# Altium PCB ART_CARD Rev 5.PcbDoc (part 6 of 13)
Units mil, origin at the board's own origin, x right, y up, seen from the top; angles counter-clockwise.
Board outline 6600.39 x 3903.54 mil, 8 copper layers (Top, Inner Layer 2, Inner Layer 3, Inner Layer 4, Inner Layer 5, Inner Layer 6, Inner Layer 7, Bottom), stack 63.111 mil thick; 542 components, 382 nets, 2410 pads, 1433 vias.
Unrouted connection lines stored in the file: 1247.
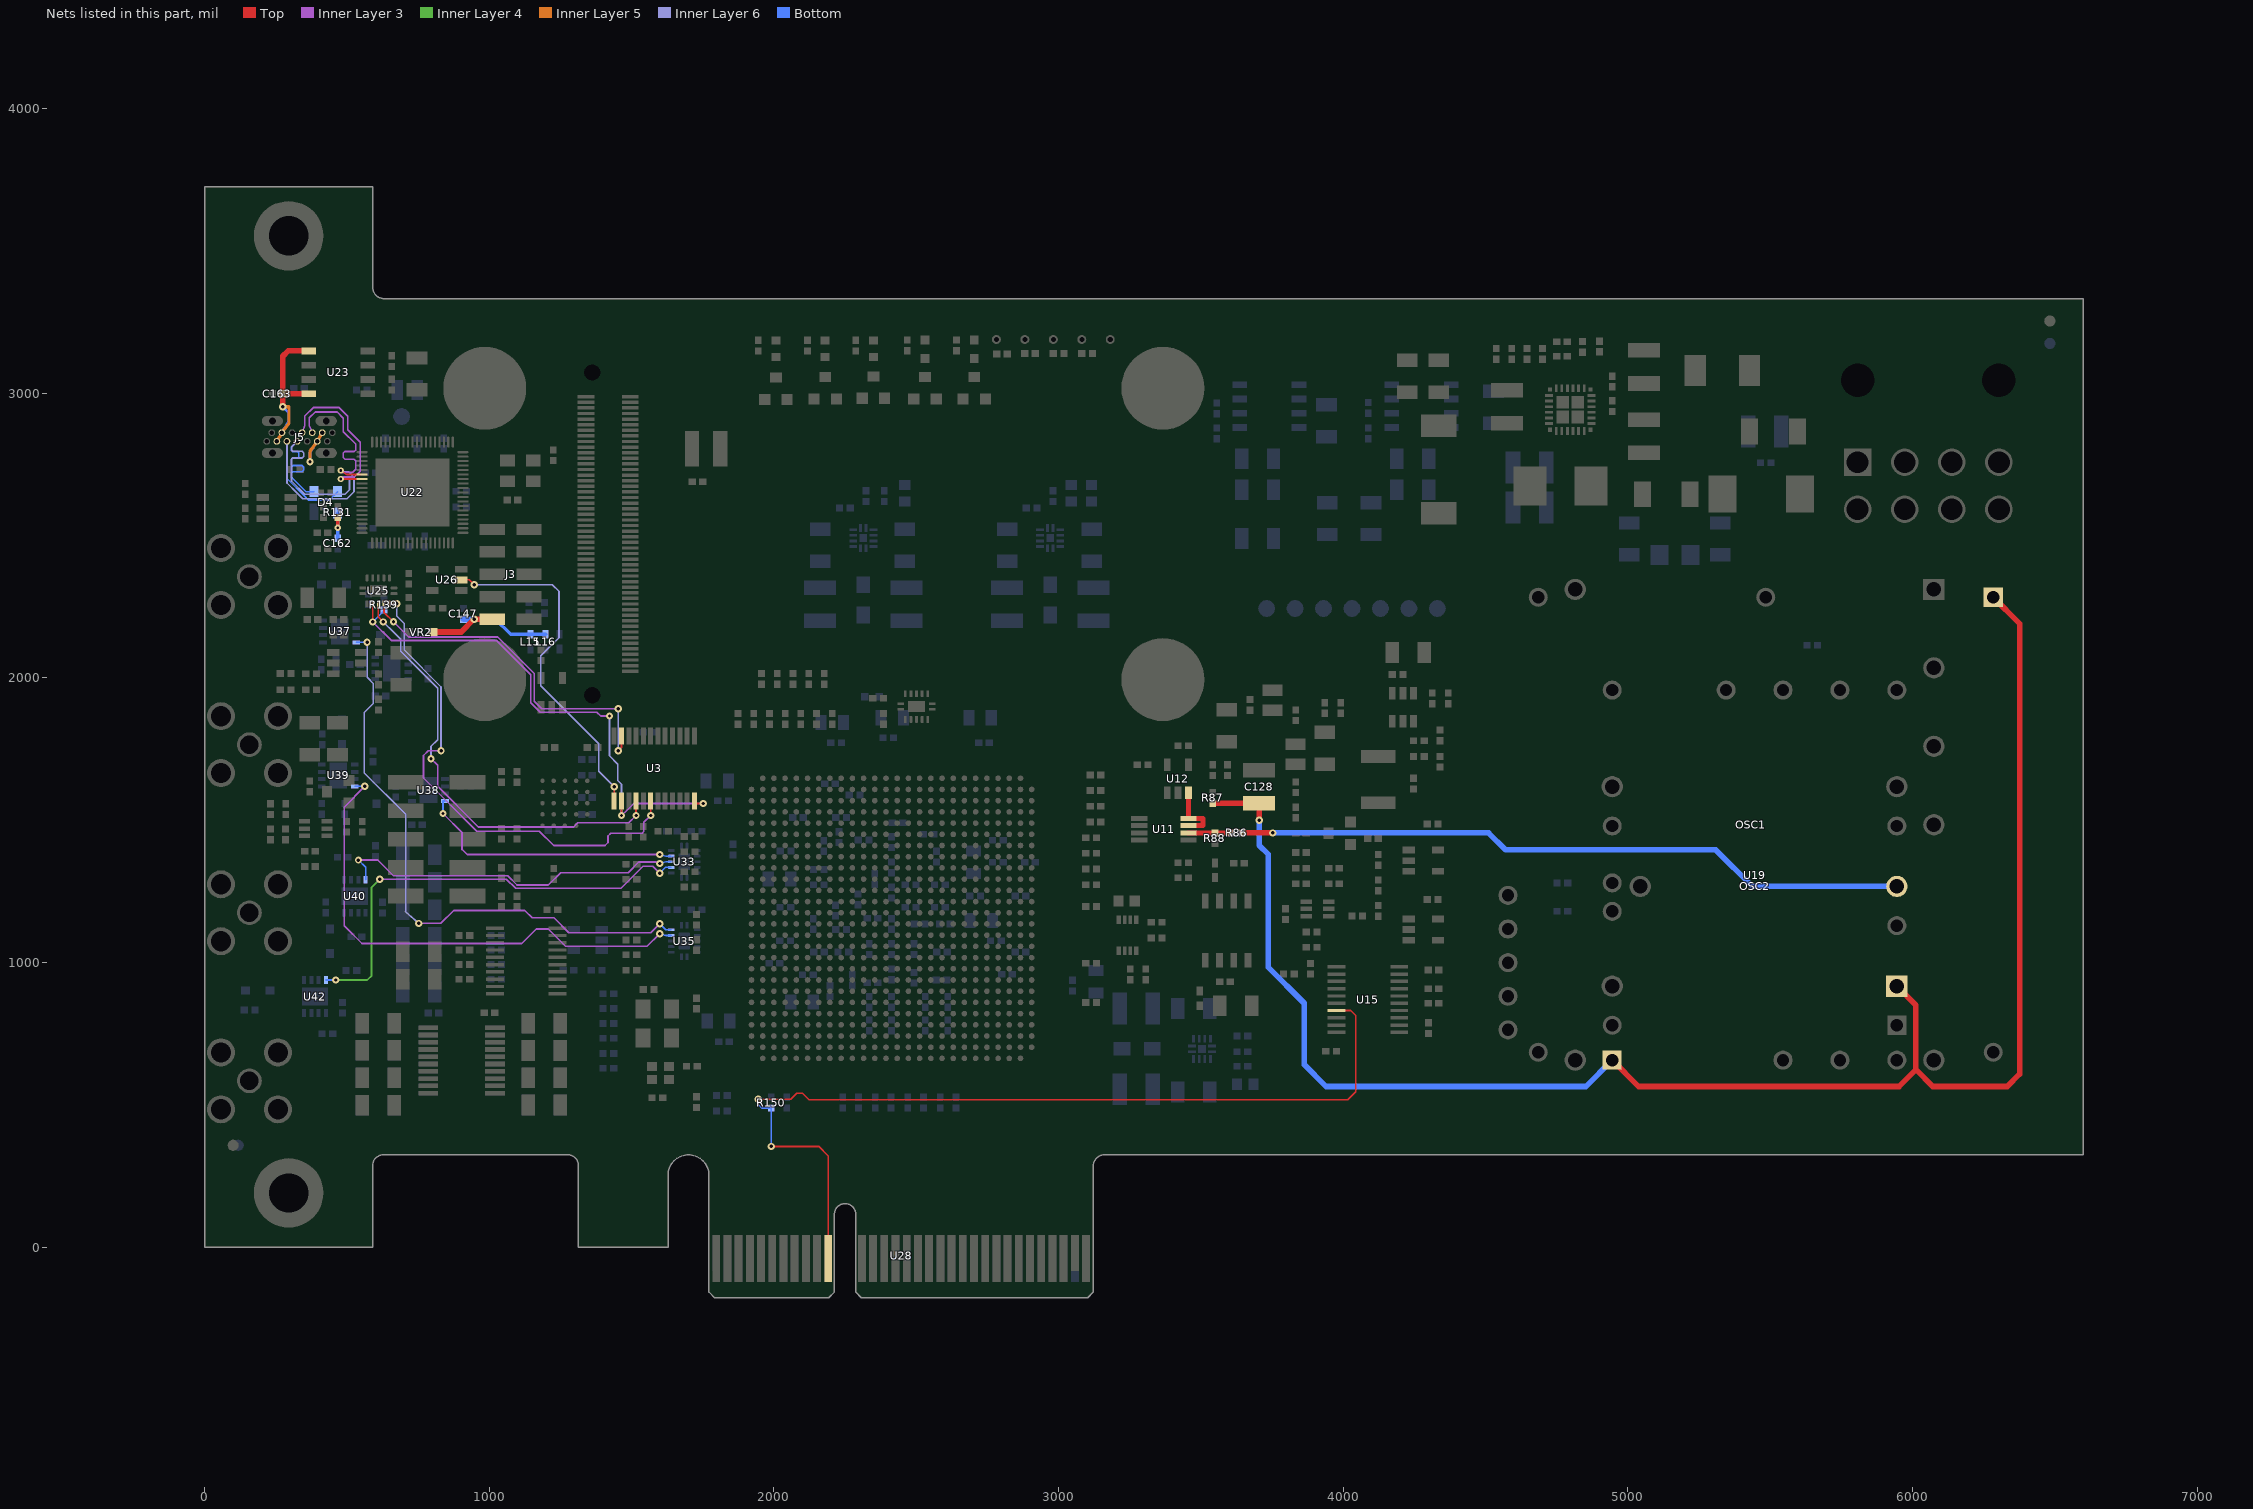
[diagram p12: the nets of this part, all layers, seen from the top]

## Via types
v1: diameter 25.59, hole 11.81, Top to Bottom, 915 vias
v2: diameter 21.65, hole 9.84, Top to Bottom, 518 vias

## Nets (pads, with @x,y where several pads share a name; then routed paths per layer and width w, separated by ;. In a path a pad name is that pad's centre, name@x,y a point inside that pad or via, vN(x,y) a via of type N, cw(c..) or ccw(c..) an arc to the next point about the centre after c; other vN are vias at no path point) (continued)
U_SEL_IO0F: U35.13 U37.8 | length 2089.8
  Inner Layer 3 w5.91: v1(751.97,1137.8) 829.72,1137.8 875,1183.07 1125,1183.07 1150.59,1157.48 1227.36,1157.48 1279.53,1105.31 1566.93,1105.31 v1(1598.43,1136.81)
  Inner Layer 6 w5.91: v1(570.87,2125) 570.87,2001.97 592.52,1980.31 592.52,1910.43 561.02,1878.94 561.02,1666.34 706.69,1520.67 706.69,1180.12 705.71,1179.13 v1(751.97,1137.8)
  Bottom w5.91: U37.8@532.48,2125 v1(570.87,2125) ; v1(1598.43,1136.81) 1620.08,1115.16 U35.13@1639.76,1115.16
U_SEL_IO1: U33.12 U38.8 | length 948.3
  Inner Layer 3 w5.91: v1(837.6,1523.62) 904.53,1456.69 904.53,1397.64 922.24,1379.92 v1(1598.43,1379.92)
  Bottom w5.91: v1(837.6,1523.62) 837.6,1567.91 U38.8@844.49,1567.91 ; v1(1598.43,1379.92) 1620.08,1374.02 U33.12@1639.76,1374.02
U_SEL_IO1F: U35.12 U39.8 | length 1796.1
  Inner Layer 3 w5.91: v1(562.99,1619.09) 490.16,1546.26 490.16,1129.92 553.15,1066.93 1114.17,1066.93 1165.35,1118.11 1206.69,1118.11 1267.72,1057.09 1554.13,1057.09 v1(1598.43,1101.38)
  Bottom w5.91: U39.8@527.56,1619.09 v1(562.99,1619.09) ; v1(1598.43,1101.38) 1620.08,1095.47 U35.12@1639.76,1095.47
U_SEL_IO2: U33.11 U40.8 | length 1251.5
  Inner Layer 3 w5.91: v1(540.35,1360.24) 608.27,1360.24 663.39,1305.12 1064.96,1305.12 1097.44,1272.64 1207.68,1272.64 1250.98,1315.94 1488.19,1315.94 1525.59,1353.35 1593.5,1353.35 v1(1598.43,1348.43)
  Bottom w5.91: v1(540.35,1360.24) 565.94,1334.65 U40.8@565.94,1291.34 ; v1(1598.43,1348.43) 1620.08,1354.33 U33.11@1639.76,1354.33
U_SEL_IO3: U33.10 U42.8 | length 1607
  Inner Layer 3 w5.91: v1(615.16,1293.31) 1060.04,1293.31 1092.52,1260.83 1462.6,1260.83 1540.35,1338.58 1573.82,1338.58 v1(1598.43,1313.98)
  Inner Layer 4 w5.91: v1(460.63,938.98) 571.85,938.98 586.61,953.74 586.61,1264.76 v1(615.16,1293.31)
  Bottom w5.91: U42.8@426.18,938.98 v1(460.63,938.98) ; v1(1598.43,1313.98) 1619.09,1334.65 U33.10@1639.76,1334.65
USB_DM: D4.3 J5.A7 J5.B7 U22.63 | length 1472.9
  Top w5.91: v2(478.35,2728.35) 500.98,2714.57 U22.63@553.15,2714.57
  Inner Layer 3 w5.91: J5.A7@377.95,2861.81 368.11,2887.25 368.11,2913.75 388.41,2934.06 465.92,2934.06 487.21,2912.77 487.21,2865.16 530.51,2821.85 530.51,2800.2 525.59,2795.28 492.13,2795.28 487.2,2790.35 487.2,2774.61 493.11,2768.7 524.61,2768.7 530.51,2762.8 530.51,2732.9 519.07,2721.46 485.24,2721.46 v2(478.35,2728.35)
  Inner Layer 6 w5.91: J5.B7@289.37,2831.1 289.37,2685.04 323.82,2650.59 344.49,2629.92 500,2629.92 524.61,2654.53 524.61,2704.72 505.91,2723.43 483.27,2723.43 v2(478.35,2728.35)
  Bottom w5.91: J5.B7@289.37,2831.1 289.37,2700.79 351.87,2638.29 365.16,2625 383.86,2625 437.99,2625 D4.3@467.52,2654.53
USB_DP: D4.2 J5.A6 J5.B6 U22.64 | length 1477.5
  Top w5.91: v2(478.35,2698.82) U22.64@553.15,2698.82
  Inner Layer 3 w5.91: J5.A6@342.52,2861.81 352.36,2887.25 352.36,2920.28 381.89,2949.8 472.44,2949.8 502.95,2919.29 502.95,2871.68 546.26,2828.37 546.26,2800.2 546.26,2732.9 546.26,2726.38 525.59,2705.71 485.24,2705.71 v2(478.35,2698.82)
  Inner Layer 6 w5.91: J5.B6@324.8,2831.1 306.1,2812.4 306.1,2800.2 310.04,2796.26 342.52,2796.26 348.43,2790.35 348.43,2778.54 342.52,2772.64 309.06,2772.64 305.12,2768.7 305.12,2691.93 351.38,2645.67 493.11,2645.67 508.86,2661.42 508.86,2697.83 501.97,2704.72 500,2704.72 484.25,2704.72 v2(478.35,2698.82)
  Bottom w5.91: J5.B6@324.8,2831.1 304.13,2810.43 304.13,2800.2 309.06,2795.28 326.77,2795.28 330.71,2791.34 330.71,2775.59 326.77,2771.65 309.06,2771.65 304.13,2766.73 304.13,2750 308.07,2746.06 342.52,2746.06 348.43,2740.16 348.43,2730.31 342.52,2724.41 309.06,2724.41 304.63,2719.98 304.63,2706.2 356.3,2654.53 D4.2@384.84,2654.53
USB_SPI_CLK: U3.18 U25.13 | length 1777.7
  Top w5.91: U25.13@649.61,2260.83 v1(675.2,2260.83) ; v1(1566.93,1516.73) U3.18@1566.93,1567.91
  Inner Layer 3 w5.91: v1(830.71,1744.09) 785.43,1744.09 768.7,1727.36 768.7,1648.62 955.71,1461.61 1176.18,1461.61 1226.38,1411.42 1406.5,1411.42 1417.32,1422.24 1417.32,1444.88 1427.17,1454.72 1536.91,1454.72 1542.82,1460.63 1542.82,1492.62 v1(1566.93,1516.73)
  Inner Layer 6 w5.91: v1(675.2,2260.83) 675.2,2217.52 701.28,2191.44 701.28,2097.93 830.71,1968.5 v1(830.71,1744.09)
USB_SPI_CSN: U3.16 U25.11 | length 1571.6
  Top w5.91: U25.11@610.24,2260.83 610.24,2214.57 v1(627.95,2196.85) ; v1(1515.75,1516.73) U3.16@1515.75,1567.91
  Inner Layer 3 w5.91: v1(795.28,1716.54) 818.9,1692.91 818.9,1619.09 961.61,1476.38 1296.26,1476.38 1311.02,1491.14 1490.16,1491.14 v1(1515.75,1516.73)
  Inner Layer 6 w5.91: v1(627.95,2196.85) 666.34,2158.46 688.98,2135.83 688.98,2093.5 818.9,1963.58 818.9,1783.46 795.28,1759.84 v1(795.28,1716.54)
USB_SPI_CTRL: R139.2 U3.14 U3.24 U25.10 | length 1911.5
  Top w5.91: v1(590.55,2196.85) U25.10@590.55,2260.83 ; v1(1464.57,1516.73) U3.14@1464.57,1567.91 ; U3.24@1720.47,1567.91 1720.47,1559.06 v1(1751.97,1559.06)
  Inner Layer 3 w5.91: v1(590.55,2196.85) 655.51,2131.89 1024.61,2131.89 1145.67,2010.83 1145.67,1913.39 1179.13,1879.92 1377.95,1879.92 1391.73,1866.14 v1(1422.24,1866.14) ; v1(1464.57,1516.73) 1483.27,1534.41 1507.91,1559.06 v1(1751.97,1559.06)
  Inner Layer 6 w5.91: v1(1422.24,1866.14) 1422.24,1726.87 1451.77,1697.34 1451.77,1639.76 1464.57,1626.97 v1(1464.57,1516.73)
  Bottom w5.91: v1(590.55,2196.85) 628.94,2235.24 628.94,2236.22 629.92,2237.2 R139.2@629.92,2239.17
USB_SPI_MISO: U3.13 U26.2 | length 1229.8
  Top w5.91: U26.2@901.57,2344.49 930.12,2344.49 v1(946.85,2327.76) ; U3.13@1438.98,1567.91 v1(1438.98,1618.11)
  Inner Layer 6 w5.91: v1(946.85,2327.76) 1221.46,2327.76 1245.08,2304.13 1245.08,2141.73 1181.1,2077.76 1181.1,1972.44 1384.84,1768.7 1384.84,1672.24 v1(1438.98,1618.11)
USB_SPI_MOSI: U3.11 U25.12 | length 1254.8
  Top w5.91: U25.12@629.92,2260.83 629.92,2231.3 v1(663.39,2197.83) ; v1(1452.76,1744.09) 1464.57,1755.91 U3.11@1464.57,1796.26
  Inner Layer 3 w5.91: v1(663.39,2197.83) 717.52,2143.7 1029.53,2143.7 1157.48,2015.75 1157.48,1918.31 1184.06,1891.73 v1(1452.76,1891.73)
  Inner Layer 6 w5.91: v1(1452.76,1744.09) v1(1452.76,1891.73)
V_ASSERV: C128.1 OSC1.1 OSC2.1 R87.2 U19.1 | length 5870
  Top w19.68: R87.2@3541.34,1560.04 C128.1@3704.72,1560.04 v1(3704.72,1500) ; U19.1@4944.88,657.48 5037.4,564.96 5952.76,564.96 6011.81,624.02 ; OSC2.1@5944.88,917.32 6011.81,850.39 6011.81,624.02 ; OSC1.1@6283.46,2283.46 6375.98,2190.94 6375.98,608.27 6332.68,564.96 6070.87,564.96 6011.81,624.02
  Bottom w19.68: v1(3704.72,1500) 3704.72,1412.4 3736.22,1380.91 3736.22,984.25 3863.19,857.28 3863.19,641.73 3939.96,564.96 4852.36,564.96 U19.1@4944.88,657.48
VBUS_USB: C162.1 C163.1 D4.4 J5.A4 J5.A9 J5.B4 J5.B9 R131.1 U23.5 U23.8 | length 947.3
  Top w11.81: v2(467.52,2527.56) R131.1@467.52,2563.98
  Top w19.68: v1(274.61,2952.76) C163.1@274.61,2999.02 ; U23.8@365.16,2998.82 314.17,2998.82 313.98,2999.02 C163.1@274.61,2999.02 ; U23.5@365.16,3148.82 293.31,3148.82 274.61,3130.12 C163.1@274.61,2999.02
  Inner Layer 5 w11.81: J5.B9@253.94,2831.1 J5.A4@271.65,2861.81 296.26,2895.67 296.26,2952.76 v1(274.61,2952.76) ; v1(370.08,2759.84) 370.08,2796.6 J5.B4@395.67,2831.1 J5.A9@413.39,2861.81
  Bottom w9.84: J5.A4@271.65,2861.81 295.28,2901.57 295.28,2932.09 v1(274.61,2952.76) ; v1(370.08,2759.84) 370.08,2791.34 J5.B4@395.67,2831.1
  Bottom w11.81: C162.1@467.52,2491.14 v2(467.52,2527.56) D4.4@467.52,2579.72
VCC_ANT: C147.1 J3.1 L15.1 L16.1 VR2.1 | length 536.4
  Top w19.68: VR2.1@803.15,2161.42 901.57,2161.42 v1(946.85,2206.69) J3.1@1010.43,2206.69
  Bottom w11.81: v1(946.85,2206.69) 1021.65,2206.69 1074.8,2153.54 L15.1@1144.69,2153.54 L16.1@1197.83,2153.54
  Bottom w19.68: C147.1@909.45,2206.69 v1(946.85,2206.69)
VDAC: U11.3 U11.4 U12.3 | length 215.6
  Top w17.72: U11.3@3456.69,1481.3 3506.89,1481.3 3506.89,1506.89 U11.4@3456.69,1506.89 U12.3@3456.69,1596.46
VREF_DAC: R86.2 R88.2 U11.2 | length 150.6
  Top w17.72: U11.2@3456.69,1455.71 R88.2@3549.21,1455.71 R86.2@3607.28,1455.71
VREF_OCXO: OSC2.2 R86.1 | length 2378.1
  Top w19.68: R86.1@3644.69,1455.71 v1(3751.97,1455.71)
  Bottom w19.68: v1(3751.97,1455.71) 4510.83,1455.71 4569.88,1396.65 5308.07,1396.65 5437.01,1267.72 OSC2.2@5944.88,1267.72
WAKEN: R150.2 U15.17 U28.B11 | length 3251.6
  Top w5.91: v1(1944.88,519.69) 2059.06,519.69 2080.71,541.34 2100.39,541.34 2123.03,518.7 2140.75,518.7 2141.73,517.72 4015.75,517.72 4044.29,546.26 4044.29,643.7 4044.29,813.98 4026.57,831.69 U15.17@3976.38,831.69 ; v1(1990.16,354.33) 2157.48,354.33 2190.94,320.87 U28.B11@2190.94,-39.37
  Bottom w5.91: v1(1944.88,519.69) 1944.88,500.98 1956.69,489.17 R150.2@1990.16,489.17 v1(1990.16,354.33)
pads on no net: J1.6 J1.7 J1.8 J2.9 J2.10 J3.9 J3.10 J4.78 J4.87 J4.88 J4.101 J4.102 MIRE1.1 MIRE2.1 MIRE3.1 MIRE4.1 OSC2.5 U1.A7 U1.AA7 U1.AA8 U1.AA9 U1.AA11 U1.AA12 U1.AA13 U1.AA14 U1.AA16 U1.AA17 U1.AA18 U1.AA19 U1.AA21 U1.AA25 U1.AA26 U1.AB4 U1.AB5 U1.AB6 U1.AB9 U1.AB10 U1.AB11 U1.AB13 U1.AB14 U1.AB15 U1.AB16 U1.AB18 U1.AB19 U1.AB20 U1.AB21 U1.AC3 U1.AC5 U1.AC6 U1.AC7 U1.AC8 U1.AC10 U1.AC11 U1.AC12 U1.AC15 U1.AC16 U1.AC17 U1.AC18 U1.AC20 U1.AC21 U1.AC25 U1.AC26 U1.AD5 U1.AD7 U1.AD8 U1.AD9 U1.AD10 U1.AD12 U1.AD13 U1.AD14 U1.AD15 U1.AD17 U1.AD18 U1.AE19 U1.AE25 U1.AE26 U1.AF21 U1.AF22 U1.B6 U1.B8 U1.B11 U1.B13 U1.B14 U1.B15 U1.B16 U1.B18 U1.B19 U1.C5 U1.C6 U1.C10 U1.C11 U1.C12 U1.C13 U1.C15 U1.C16 U1.C17 U1.C18 U1.C20 U1.C21 U1.C25 U1.C26 U1.D7 U1.D8 U1.D9 U1.D10 U1.D12 U1.D13 U1.D14 U1.D15 U1.D17 U1.D18 U1.D19 U1.D20 U1.E9 U1.E10 U1.E11 U1.E14 U1.E15 U1.E16 U1.E17 U1.E19 U1.E20 U1.E21 U1.E25 U1.E26 U1.F7 U1.F8 U1.F11 U1.F12 U1.F13 U1.F14 U1.F16 U1.F17 U1.F18 U1.F19 U1.F21 U1.G10 U1.G11 U1.G13 U1.G14 U1.G15 U1.G16 U1.G18 U1.G19 U1.G20 U1.G25 U1.G26 U1.H7 U1.H10 U1.H12 U1.H13 U1.H15 U1.H16 U1.H18 U1.H20 U1.H21 U1.J13 U1.J14 U1.J15 U1.J17 U1.J18 U1.J19 U1.J25 U1.J26 U1.K6 U1.K7 U1.K14 U1.K19 U1.L6 U1.L7 U1.L19 U1.M3 U1.M6 U1.M18 U1.M19 U1.N5 U1.N6 U1.N7 U1.P4 U1.P5 U1.P7 U1.P19 U1.R4 U1.R7 U1.R10 U1.R11 U1.R19 U1.T4 U1.T6 U1.T7 U1.T19 U1.U4 U1.U5 U1.U6 U1.U19 U1.V2 U1.V3 U1.V5 U1.V6 U1.V7 U1.V8 U1.V13 U1.V16 U1.V18 U1.W2 U1.W3 U1.W7 U1.W8 U1.W9 U1.W10 U1.W12 U1.W13 U1.W14 U1.W15 U1.W17 U1.W18 U1.W19 U1.W20 U1.W25 U1.W26 U1.Y6 U1.Y7 U1.Y9 U1.Y10 U1.Y11 U1.Y12 U1.Y14 U1.Y15 U1.Y16 U1.Y17 U1.Y19 U1.Y20 U1.Y21 U3.3 U4.A2 U4.A3 U4.A5 U4.B1 U4.B5 U4.C1 U4.C3 U4.C5 U4.D1 U4.D5 U4.E1 U4.E2 U4.E3 U4.E4 U4.E5 U5.4 U6.7 U6.19 U10.4 U13.1 U13.3 U13.5 U13.7 U13.8 U14.5 U17.1 U18.1 U21.1 U22.5 U22.6 U22.7 U22.15 U22.16 U22.17 U22.19 U22.20 U22.21 U22.22 U22.23 U22.24 U22.25 U22.26 U22.34 U22.35 U22.36 U22.37 U22.38 U22.39 U22.40 U22.42 U22.43 U22.44 U22.46 U22.48 U22.49 U22.50 U22.51 U22.52 U22.53 U22.56 U22.57 U22.58 U22.59 U22.60 U22.61 U22.71 U22.72 U22.73 U23.4 U25.6 U25.9 U26.1 U28.A5 U28.A8 U28.A19 U28.A32 U28.B5 U28.B6 U28.B9 U28.B10 U28.B12 U28.B30 U29.5 U31.6 U31.9 U33.6 U33.9 U35.6 U35.9 U41.3 U41.5 U41.7 Y3.2 Y3.4